# Altium PCB PC110-itx.PcbDoc (part 5 of 16)
Units mm, origin at the board's own origin, x right, y up, seen from the top; angles counter-clockwise.
Board outline 170 x 170 mm, 16 copper layers (FC1, FC2, FC3, FC4, IP1, IC1, IC2, IP2, IP3, IC3, IC4, IP4, BC4, BC3, BC2, BC1), stack 3.903 mm thick; 935 components, 1357 nets, 4698 pads, 3240 vias.
Unrouted connection lines stored in the file: 552.
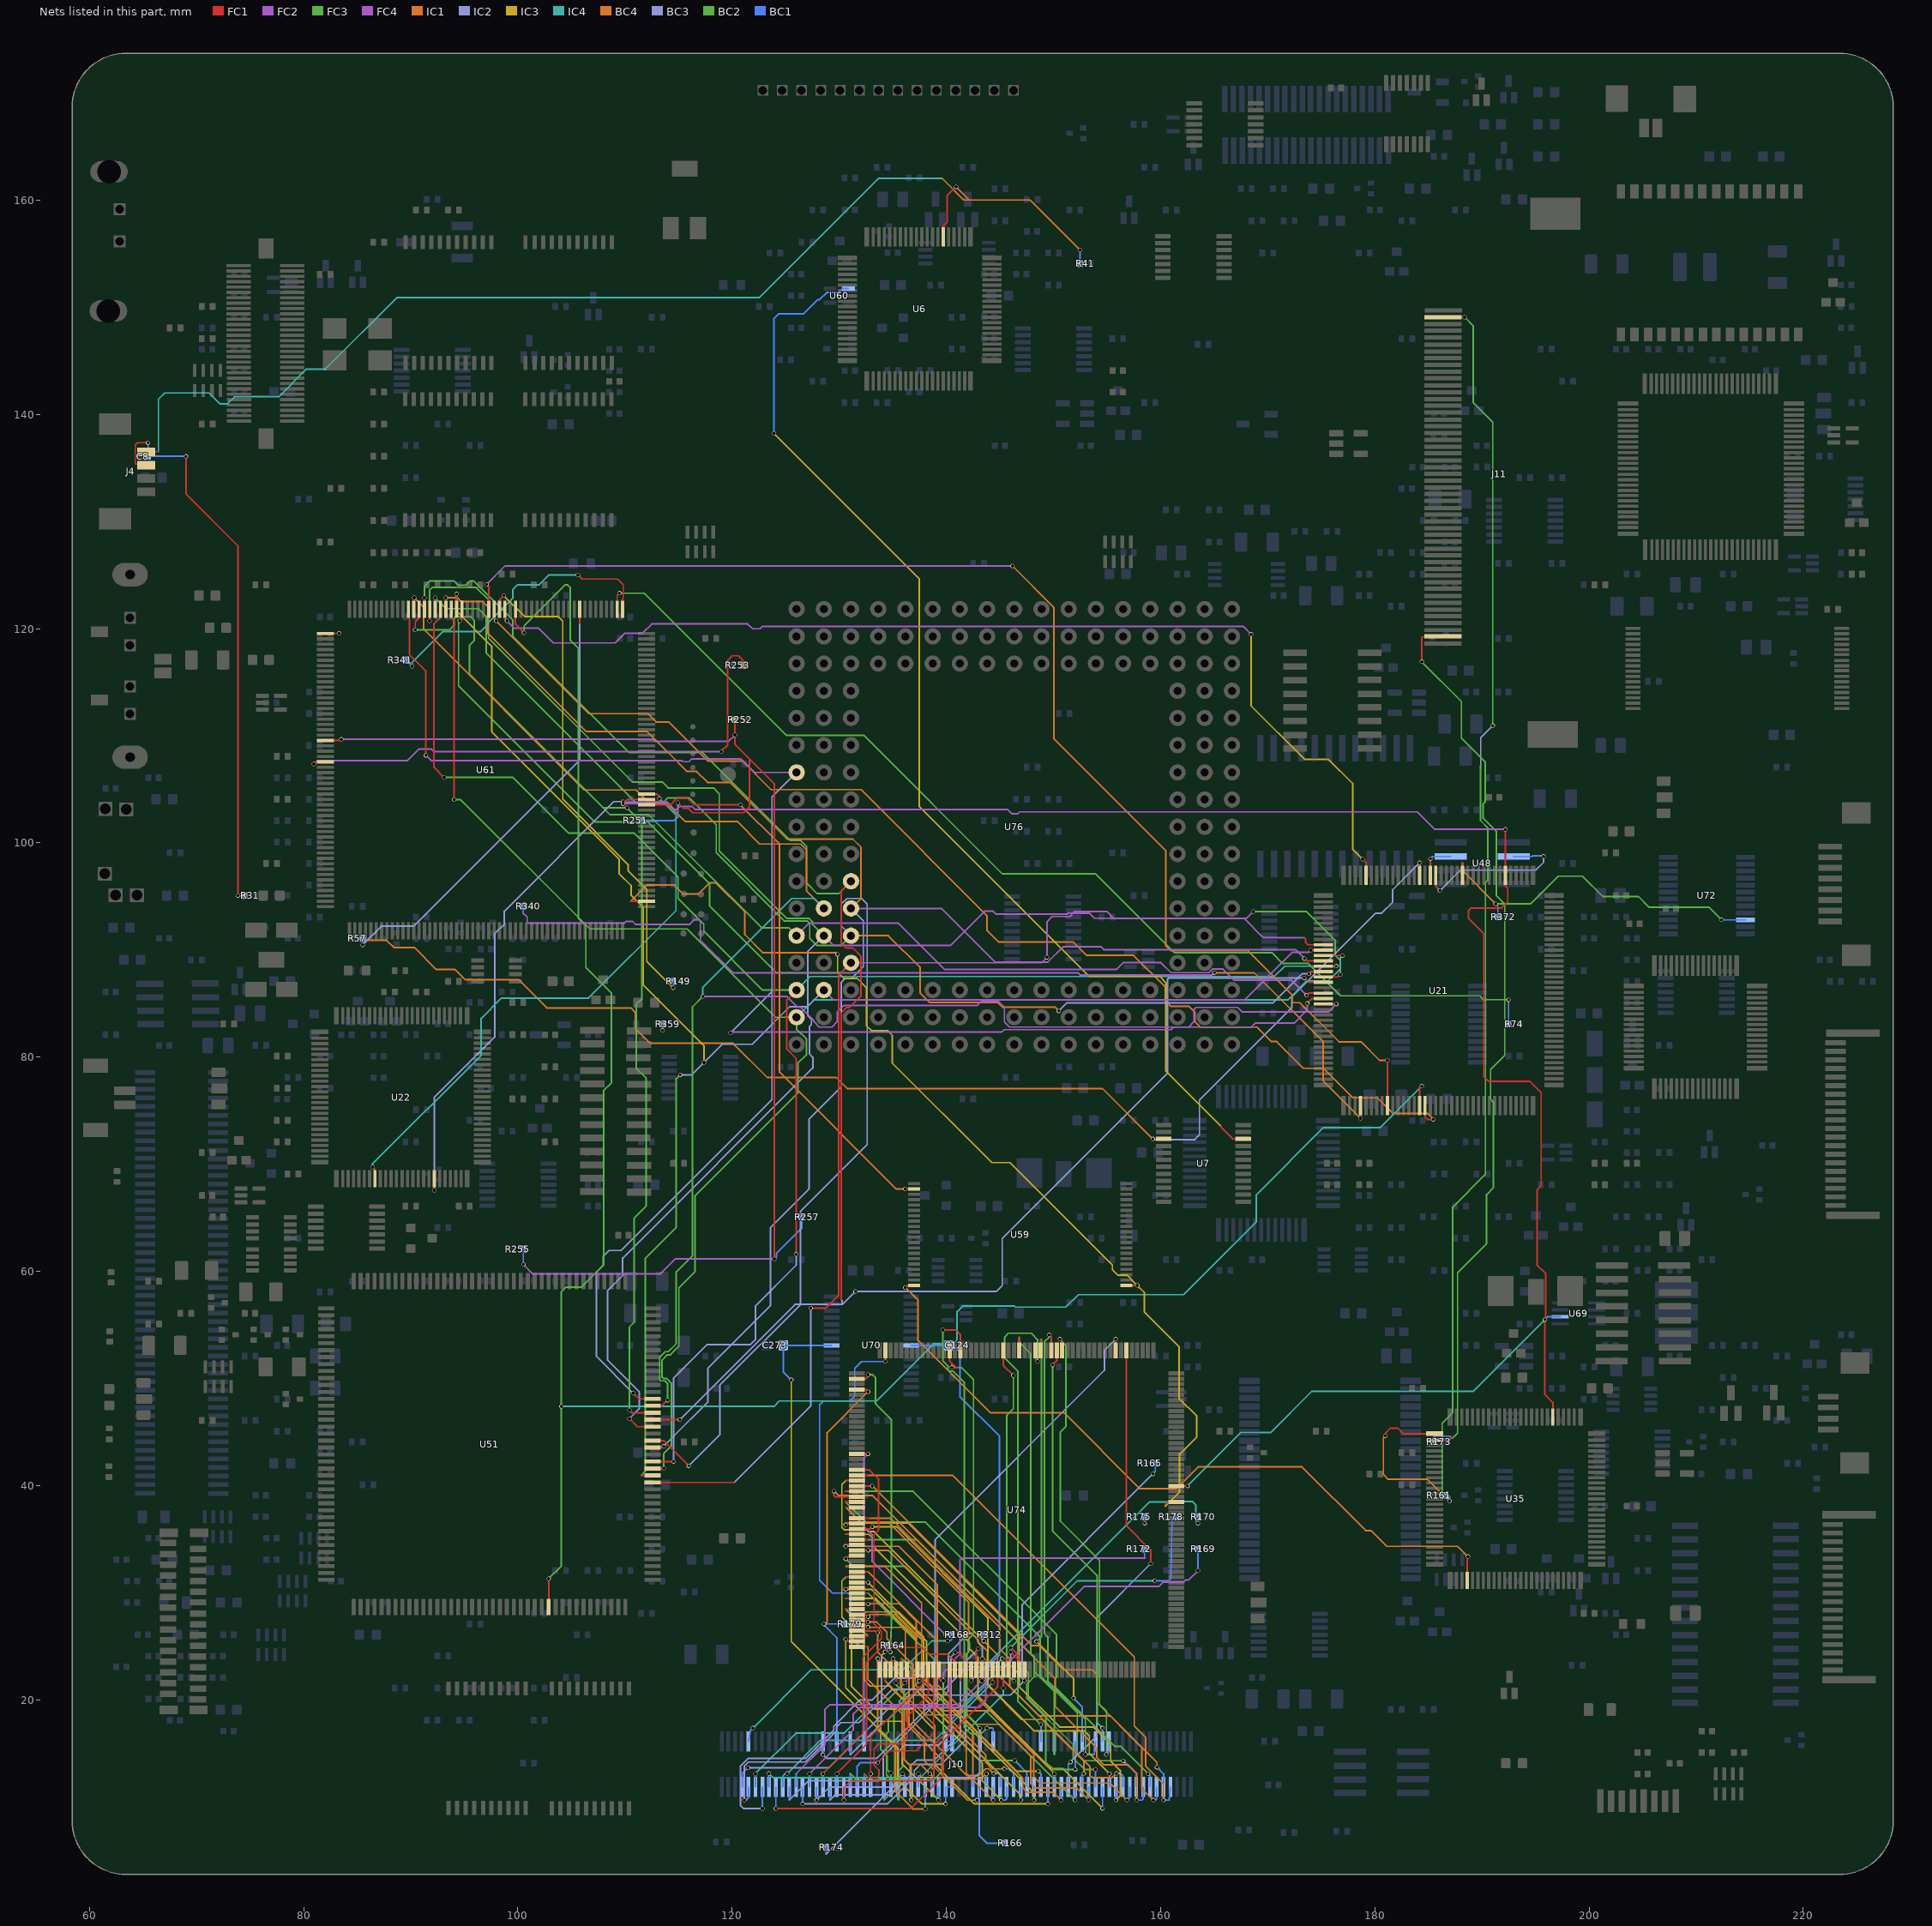
[diagram p18: the nets of this part, all layers, seen from the top]

## Via types
v1: diameter 0.4, hole 0.3, FC1 to BC1, 3240 vias

## Nets (pads, with @x,y where several pads share a name; then routed paths per layer and width w, separated by ;. In a path a pad name is that pad's centre, name@x,y a point inside that pad or via, vN(x,y) a via of type N, cw(c..) or ccw(c..) an arc to the next point about the centre after c; other vN are vias at no path point) (continued)
ACD14: J10.13 U74.18 | length 43.4
  FC1 w0.15: v1(150.597,53.67) 150.808,53.459 U74.18@150.808,52.619
  FC3 w0.15: v1(150.597,53.67) 151.155,53.111 151.155,45.517 150.647,45.009 150.647,36.678 154.306,33.019 154.306,19.583 154.94,18.948 v1(154.94,14.91)
  BC1 w0.15: v1(154.94,14.91) 155.179,15.149 J10.13@155.179,16.129
ACD15: J10.15 U74.20 | length 44.5
  FC1 w0.15: v1(149.606,54.077) 149.808,53.875 U74.20@149.808,52.619
  FC3 w0.15: v1(149.606,54.077) 149.606,53.873 149.149,53.416 149.149,26.191 149.485,25.855 149.485,21.711 152.984,18.212 v1(152.984,14.91)
  BC1 w0.15: v1(152.984,14.91) 153.822,14.91 J10.15@153.929,16.129
ACE1#: J10.14 U74.19 | length 38.6
  FC1 w0.15: v1(149.911,51.257) 150.308,51.654 U74.19@150.308,52.619
  FC3 w0.15: v1(149.911,51.257) 149.911,35.789 154.076,31.624 154.076,17.877 v1(154.579,17.374)
  BC1 w0.15: J10.14@154.579,16.129 v1(154.579,17.374)
ACE2#: J10.17 U74.22 | length 40.6
  FC1 w0.15: U74.22@148.808,52.619 148.808,53.609
  FC3 w0.15: v1(148.412,25.451) 148.869,25.908 148.869,53.67 148.808,53.609
  IC3 w0.15: v1(148.412,25.451) 151.866,21.997 v1(151.866,20.168)
  BC1 w0.15: v1(151.866,20.168) 152.679,19.355 J10.17@152.679,16.129
ACIORD#: J10.21 U74.26 | length 42.9
  FC1 w0.15: U74.26@146.808,52.619 146.808,53.869
  FC3 w0.15: 146.808,53.869 146.812,53.873 146.812,53.386 147.879,52.319 147.879,24.376 148.209,24.046 148.209,22.657 150.089,20.777 150.089,14.884 150.079,14.894
  BC1 w0.15: 150.079,14.894 J10.21@150.079,16.129
ACIOWR#: J10.23 U74.29 | length 38.5
  FC1 w0.15: U74.29@145.308,52.619 145.308,51.237 v1(146.253,50.292)
  FC3 w0.15: v1(146.253,50.292) 146.253,47.193 145.64,46.58 145.64,23.549 146.685,22.504 146.685,19.848 v1(148.829,17.704)
  BC1 w0.15: J10.23@148.829,16.129 v1(148.829,17.704)
AEN: U21.114 U22.44 U35.6 U61.21 U69.6 U74.187 | length 242.1
  FC1 w0.15: v1(92.2,67.579) U22.44@92.2,68.66 ; v1(109.825,103.657) 110.225,104.057 U61.21@112.028,104.057 ; U74.187@161.458,39.969 162.499,39.969 v1(162.509,39.98) ; v1(192.182,101.27) U21.114@192.182,96.966 192.182,95.961 192.405,95.738 192.405,94.513 191.821,93.929 188.976,93.929 188.747,93.701 188.747,92.939 190.17,91.516 190.17,78.181 190.602,77.749 194.462,77.749 195.529,76.683 195.529,67.996 195.148,67.615 195.148,60.604 195.961,59.792 v1@195.961,55.582 ; v1(195.885,55.506) 195.885,48.489 196.62,47.753 U35.6@196.62,46.4
  FC2 w0.15: v1(109.825,103.657) 114.104,103.657 ; v1(109.825,103.861) 109.89,103.796 113.965,103.796 114.104,103.657 ; v1(192.182,101.27) 185.593,101.27 183.962,102.9 146.837,102.9 146.655,102.718 146.127,102.718 145.73,103.115 116.546,103.115 116.257,103.404 115.087,103.404 114.797,103.115 114.646,103.115 114.104,103.657
  IC4 w0.15: v1(162.509,39.98) 167.483,44.954 170.256,44.954 174.095,48.793 189.172,48.793 v1(195.885,55.506) v1@195.961,55.582
  BC3 w0.15: v1(92.2,67.579) 92.2,76.23 97.841,81.87 97.841,91.542 98.73,92.431 98.73,93.631 108.959,103.861 v1(109.825,103.861)
  BC1 w0.15: v1(195.885,55.506) 196.144,55.765 U69.6@197.3,55.765
AINPACK#: J10.53 R179.2 U74.56 | length 38
  FC1 w0.15: U74.56@131.658,48.969 132.489,48.969 v1(132.69,48.768)
  IC1 w0.15: v1(128.575,27.09) 128.575,26.996 128.622,27.043 128.879,27.3 128.879,44.957 v1(132.69,48.768)
  BC1 w0.15: v1@128.575,26.996 129.779,25.791 J10.53@129.779,16.129 ; v1(128.575,27.09) R179.2@130.49,27.09
AOE#: J10.18 U74.23 | length 53.6
  FC1 w0.15: U74.23@148.308,52.619 148.308,51.793 v1(148.514,51.587)
  FC3 w0.15: v1(148.514,51.587) 148.514,53.645 147.93,54.228 145.795,54.228 145.44,53.873 145.44,51.918 146.685,50.673 146.685,23.449 147.663,22.471 147.663,20.129 149.276,18.517 149.276,14.199 149.961,13.513 v1(152.029,13.513)
  BC1 w0.15: v1(152.029,13.513) J10.18@152.029,16.129
ARDY: J10.32 R174.2 U74.39 | length 61.9
  FC1 w0.15: U74.39@140.308,52.619 140.308,51.64 140.511,51.437 ; 140.511,51.437 140.918,51.031 v1(140.511,51.031) 140.511,51.437
  FC3 w0.15: v1(140.511,51.031) 141.407,51.031 142.531,49.907 142.531,26.149 142.078,25.695 142.078,24.482 141.922,24.325 141.922,18.566 v1(143.129,17.359)
  IC2 w0.15: 128.776,5.615 128.778,5.613 135.915,12.751 142.646,12.751 143.129,13.233 v1(143.129,17.359)
  BC1 w0.15: 128.776,5.615 R174.2@128.776,6.223 ; J10.32@143.129,16.129 v1(143.129,17.359)
AREG#: J10.55 U74.8 | length 55.8
  FC1 w0.15: v1(155.804,53.67) 155.808,53.666 U74.8@155.808,52.619
  BC3 w0.15: v1(128.479,14.884) 128.835,14.529 133.502,14.529 138.963,19.989 138.963,34.977 154.762,50.776 154.762,52.629 v1(155.804,53.67)
  BC1 w0.15: v1(128.479,14.884) J10.55@128.479,16.129
ARESET: J10.49 U74.51 | length 44.4
  FC1 w0.15: v1(134.308,51.587) U74.51@134.308,52.619
  BC1 w0.15: J10.49@132.329,16.129 132.329,24.592 131.064,25.857 131.064,29.769 130.861,29.972 129.362,29.972 128.168,31.166 128.168,47.549 128.525,47.905 130.988,47.905 131.445,48.362 131.445,50.952 132.08,51.587 v1(134.308,51.587)
AVPP: C124.2 J10.36 J10.37 U70.8 | length 45.1
  BC1 w0.15: U70.8@136.713,53.09 C124.2@140.225,53.09 140.687,53.09 141.273,52.504 141.273,48.313 144.958,44.628 144.958,24.204 143.688,22.934 143.688,21.396 140.529,18.237 J10.36@140.529,16.129 J10.37@139.929,16.129
AWAIT: J10.51 R164.2 U74.54 | length 42.1
  FC1 w0.15: U74.54@131.658,49.969 132.486,49.969 132.69,50.172 v1(132.69,50.368)
  FC3 w0.15: v1(132.69,50.368) 133.096,50.368 133.401,50.063 133.401,47.625 134.874,46.152 134.874,27 v1(134.772,24.486)
  BC3 w0.15: 131.029,14.894 131.039,14.884 133.96,17.806 133.96,24.163 v1(134.287,24.49)
  BC1 w0.15: 131.029,14.894 J10.51@131.029,16.129 ; v1(134.287,24.49) 134.49,24.693 R164.2@134.49,25.09 134.772,25.09 v1(134.772,24.486)
AWE#: J10.30 U74.37 | length 45.8
  FC1 w0.15: v1(139.675,54.533) 140.895,54.533 141.308,54.12 U74.37@141.308,52.619
  FC3 w0.15: v1(139.675,54.533) 139.675,51.636 140.156,51.154 140.156,50.8 140.28,50.676 140.635,50.676 141.681,49.629 141.681,17.424 142.24,16.866 143.281,16.866 v1(143.789,17.374)
  BC1 w0.15: v1(143.789,17.374) 144.277,17.374 144.379,17.272 J10.30@144.379,16.129
AWP: J10.66 R168.2 U74.68 | length 45.6
  FC1 w0.15: U74.68@131.658,42.969 132.682,42.969 v1(132.69,42.977)
  IC4 w0.15: v1(121.945,17.374) 127.381,22.809 135.941,22.809 138.633,25.502 v1(140.106,25.502)
  FC4 w0.15: v1(132.69,42.977) 132.309,42.596 132.309,36.17 133.071,35.408 133.071,32.923 v1(139.903,26.09)
  BC1 w0.15: J10.66@121.529,16.129 121.691,17.12 v1(121.945,17.374) ; v1(139.903,26.09) R168.2@140.49,26.09 140.49,25.603 v1(140.106,25.502)
B5VDET: J10.89 U74.6 | length 44.9
  FC1 w0.15: U74.6@156.808,52.619 156.808,36.257 159.08,33.985 v1(159.08,32.715)
  BC3 w0.15: v1(151.582,14.194) 154.044,16.655 154.044,27.679 v1(159.08,32.715)
  BC1 w0.15: J10.89@151.379,11.879 151.379,13.99 v1(151.582,14.194)
BBVD1: J10.129 R175.1 U74.124 | length 25.8
  FC1 w0.15: v1(143.308,21.789) U74.124@143.308,22.819
  FC2 w0.15: 125.979,13.101 128.651,15.773 128.651,19.101 129.108,19.558 141.077,19.558 141.651,20.132 141.651,20.32 141.912,20.58 142.099,20.58 v1(143.308,21.789)
  BC1 w0.15: J10.129@125.979,11.879 125.979,13.101 ; v1(158.51,36.49) R175.1@158.51,37.09
BBVD2: J10.127 R170.2 U74.122 | length 56.5
  FC1 w0.15: v1(142.308,21.789) U74.122@142.308,22.819
  FC2 w0.15: v1(127.229,13.106) 131.318,17.195 131.318,18.694 131.928,19.304 143.078,19.304 143.688,19.914 143.688,21.915 143.459,22.144 142.663,22.144 v1(142.308,21.789)
  IC4 w0.15: v1(142.308,21.789) 159,38.481 162.154,38.481 162.204,38.531 162.938,38.531 163.297,38.172 163.297,36.683 v1(163.49,36.49)
  BC1 w0.15: J10.127@127.229,11.879 v1(127.229,13.106) ; v1(163.49,36.49) R170.2@163.49,37.09
BCA0: J10.128 U74.123 | length 30.7
  FC1 w0.15: U74.123@142.808,22.819 142.808,24.596 v1(143.002,24.79)
  BC3 w0.15: v1(126.579,10.287) 134.493,10.287 137.008,12.802 137.008,13.411 137.592,13.995 139.522,13.995 141.783,16.256 141.783,23.571 v1(143.002,24.79)
  BC1 w0.15: v1(126.579,10.287) J10.128@126.579,11.879
BCA1: J10.126 U74.121 | length 27.7
  FC1 w0.15: v1(140.843,24.435) 141.046,24.435 141.808,23.673 U74.121@141.808,22.819
  BC3 w0.15: v1(127.879,10.643) 129.098,11.862 134.81,11.862 135.534,12.586 135.534,15.164 136.144,15.773 139.243,15.773 140.437,16.967 140.437,24.028 v1(140.843,24.435)
  BC1 w0.15: v1(127.879,10.643) J10.126@127.879,11.879
BCA2: J10.124 U74.120 | length 22.5
  FC1 w0.15: 141.308,21.776 U74.120@141.308,22.819
  BC3 w0.15: 129.129,10.647 129.134,10.643 129.642,11.151 134.849,11.151 136.627,12.929 136.627,13.792 137.211,14.376 138.862,14.376 141.3,16.815 141.3,21.768 141.308,21.776
  BC1 w0.15: 129.129,10.647 J10.124@129.129,11.879
BCA3: J10.122 U74.118 | length 21.9
  FC1 w0.15: v1(130.429,10.643) 130.429,11.784 131.091,12.446 138.582,12.446 138.811,12.675 138.811,15.748 140.308,17.245 U74.118@140.308,22.819
  BC1 w0.15: v1(130.429,10.643) J10.122@130.429,11.879
BCA4: J10.120 U74.115 | length 16.3
  FC1 w0.15: v1(133.604,14.148) 134.696,15.239 137.159,15.239 138.808,16.888 U74.115@138.808,22.819
  BC1 w0.15: J10.120@131.679,11.879 131.679,13.818 132.009,14.148 v1(133.604,14.148)
BCA5: J10.118 U74.113 | length 13
  FC1 w0.15: v1(132.929,13.106) 132.929,16.602 137.866,21.539 137.866,22.144 137.808,22.144 U74.113@137.808,22.819
  BC1 w0.15: J10.118@132.929,11.879 v1(132.929,13.106)
BCA6: J10.116 U74.112 | length 14.9
  FC1 w0.15: U74.112@137.308,22.819 137.308,21.95 v1(137.49,21.768)
  BC2 w0.15: 134.179,10.652 134.188,10.643 135.204,11.659 135.204,16.027 135.103,16.129 135.103,19.004 135.636,19.538 135.636,19.914 v1(137.49,21.768)
  BC1 w0.15: 134.179,10.652 J10.116@134.179,11.879
BCA7: J10.114 U74.109 | length 17.4
  FC1 w0.15: U74.109@135.808,22.819 135.808,23.845
  BC2 w0.15: 135.479,10.723 135.56,10.643 135.56,13.392 135.915,13.748 135.915,19.406 137.846,21.336 137.846,22.022 137.566,22.301 137.363,22.301 135.814,23.851 135.808,23.845
  BC1 w0.15: 135.479,10.723 J10.114@135.479,11.879
BCA8: J10.94 U74.93 | length 30.7
  FC1 w0.15: v1(130.607,30.328) 130.748,30.469 U74.93@131.658,30.469
  IC3 w0.15: v1(130.607,30.328) 132.994,30.328 137.871,25.451 137.871,21.641 148.184,11.328 v1(148.184,10.647)
  BC1 w0.15: J10.94@148.179,11.879 148.179,10.652 v1(148.184,10.647)
BCA9: J10.92 U74.91 | length 38.1
  FC1 w0.15: 130.608,31.469 U74.91@131.658,31.469
  IC3 w0.15: 130.608,31.469 130.607,31.471 130.251,31.115 130.251,27.737 131.14,26.848 131.14,21.285 133.274,19.152 136.957,19.152 138.852,17.257 138.852,14.056 142.621,10.287 v1(149.479,10.287)
  BC1 w0.15: v1(149.479,10.287) J10.92@149.479,11.879
BCA10: J10.86 U74.85 | length 41.8
  FC1 w0.15: v1(130.607,34.341) 130.735,34.469 U74.85@131.658,34.469
  IC1 w0.15: v1(130.607,34.341) 135.56,34.341 139.141,30.759 139.141,21.438 142.85,17.729 144.882,17.729 147.879,14.732 147.879,12.192 148.285,11.786 152.156,11.786 v1(153.289,10.653)
  BC1 w0.15: J10.86@153.279,11.879 153.279,10.663 v1(153.289,10.653)
BCA11: J10.90 U74.89 | length 36
  FC1 w0.15: 130.615,32.469 U74.89@131.658,32.469
  IC1 w0.15: 130.615,32.469 130.607,32.461 134.29,32.461 137.693,29.058 137.693,22.144 147.142,12.695 147.142,11.786 147.549,11.379 149.992,11.379 v1(150.724,10.648)
  BC1 w0.15: v1(150.724,10.648) 150.729,10.653 J10.90@150.729,11.879
BCA12: J10.112 U74.107 | length 16.3
  FC1 w0.15: U74.107@134.808,22.819 134.808,23.632 v1(135.026,23.851)
  BC4 w0.15: v1(135.026,23.851) 135.75,23.127 135.75,21.231 136.068,20.913 136.068,14.427 136.728,13.767 v1(136.728,10.643)
  BC1 w0.15: v1(136.728,10.643) J10.112@136.729,11.879
BCA13: J10.96 U74.95 | length 29.7
  FC1 w0.15: 130.612,29.469 U74.95@131.658,29.469
  IC3 w0.15: 130.612,29.469 130.607,29.464 133.426,29.464 137.185,25.705 137.185,22.911 136.931,22.657 136.931,21.133 146.939,11.126 v1(146.939,10.653)
  BC1 w0.15: J10.96@146.929,11.879 146.929,10.663 v1(146.939,10.653)
BCA14: J10.98 U74.97 | length 28.4
  FC1 w0.15: 130.611,28.469 U74.97@131.658,28.469
  IC3 w0.15: 130.611,28.469 132.309,26.772 132.309,21.869 132.893,21.285 134.696,21.285 136.423,19.558 137.871,19.558 143.358,14.072 143.358,12.421 v1(145.136,10.643)
  BC1 w0.15: v1(145.136,10.643) 145.502,10.643 145.629,10.77 J10.98@145.629,11.879
BCA15: J10.110 U74.105 | length 19.7
  FC1 w0.15: v1(133.604,23.851) 133.808,23.647 U74.105@133.808,22.819
  BC4 w0.15: v1(133.604,23.851) 133.604,17.196 135.28,15.519 135.28,11.43 136.881,9.83 v1(138.029,9.83)
  BC1 w0.15: v1(138.029,9.83) J10.110@138.029,11.879
BCA16: J10.108 U74.103 | length 22.2
  FC1 w0.15: v1(130.607,25.679) 130.817,25.469 U74.103@131.658,25.469
  IC3 w0.15: v1(130.607,25.679) 130.607,21.133 133.733,18.006 135.74,18.006 135.865,17.882 135.865,14.057 v1(139.279,10.643)
  BC1 w0.15: v1(139.279,10.643) J10.108@139.279,11.879
BCA17: J10.95 U74.94 | length 27.2
  FC1 w0.15: U74.94@131.658,29.969 132.687,29.969
  BC2 w0.15: 132.687,29.969 132.69,29.972 138.887,23.774 138.887,18.542 143.078,14.351 v1(146.361,14.351)
  BC1 w0.15: v1(146.361,14.351) 147.529,13.183 J10.95@147.529,11.879
BCA18: J10.97 U74.96 | length 26.4
  FC1 w0.15: U74.96@131.658,28.969 v1(132.69,28.969)
  IC1 w0.15: v1(132.69,28.969) 135.598,28.969 137.185,27.381 137.185,22.374 137.096,22.285 137.096,21.425 143.688,14.834 143.688,14.148 144.272,13.564 v1(145.415,13.564)
  BC1 w0.15: v1(145.415,13.564) 145.821,13.564 146.279,13.106 J10.97@146.279,11.879
BCA19: J10.99 U74.98 | length 26.4
  FC1 w0.15: U74.98@131.658,27.969 132.486,27.969 v1(132.69,27.766)
  BC4 w0.15: v1(132.69,27.766) 132.893,27.969 135.15,27.969 137.185,25.933 137.185,22.171 136.931,21.917 136.931,17.932 141.935,12.929 143.027,12.929 143.662,13.564 143.993,13.564 v1(144.424,13.132)
  BC1 w0.15: v1(144.424,13.132) 144.902,13.132 145.029,13.005 J10.99@145.029,11.879
BCA20: J10.101 U74.100 | length 25.4
  FC1 w0.15: U74.100@131.658,26.969 132.492,26.969 v1(132.69,26.772)
  BC4 w0.15: v1(132.69,26.772) 135.865,26.772 136.169,26.467 136.169,23.063 136.5,22.733 136.5,17.526 139.573,14.453 139.573,13.005 139.979,12.598 143.231,12.598 v1(143.739,13.106)
  BC1 w0.15: J10.101@143.729,11.879 143.729,13.097 v1(143.739,13.106)
BCA21: J10.103 U74.102 | length 27.6
  FC1 w0.15: U74.102@131.658,25.969 132.679,25.969
  BC4 w0.15: 132.679,25.969 132.309,26.34 132.309,28.042 132.475,28.208 135.572,28.208 137.866,25.913 137.866,18.888 138.153,18.602 141.342,18.602 142.469,17.475 142.469,13.31 142.479,13.299
  BC1 w0.15: J10.103@142.479,11.879 142.479,13.299
BCA22: J10.109 U74.104 | length 17.2
  FC1 w0.15: U74.104@131.658,24.969 132.689,24.969
  IC1 w0.15: 132.69,24.968 132.69,21.895 135.865,18.72 135.865,14.63 136.5,13.995 137.566,13.995 v1(138.455,13.106)
  BC1 w0.15: v1(138.455,13.106) 138.679,12.883 J10.109@138.679,11.879
BCA23: J10.111 U74.106 | length 14.6
  FC1 w0.15: 134.308,21.775 U74.106@134.308,22.819
  IC1 w0.15: 134.308,21.775 136.296,19.787 136.296,18.059 137.947,16.409 137.947,14.326 138.81,13.462 138.81,12.951 138.582,12.723 137.772,12.723 v1(137.389,13.106)
  BC1 w0.15: J10.111@137.379,11.879 137.379,13.097 v1(137.389,13.106)
BCA24: J10.113 U74.108 | length 14.1
  FC1 w0.15: v1(135.306,21.59) 135.308,21.592 U74.108@135.308,22.819
  FC3 w0.15: v1(135.306,21.59) 135.306,21.389 136.05,20.644 136.05,19.304 135.837,19.091 135.499,19.091 134.595,18.186 134.595,17.043 134.414,16.862 134.414,13.005 134.664,12.754 135.563,12.754 v1(135.915,13.106)
  BC1 w0.15: v1(135.915,13.106) 136.129,12.893 J10.113@136.129,11.879
BCA25: J10.115 U74.110 | length 12.4
  FC1 w0.15: v1(136.119,21.59) 136.308,21.779 U74.110@136.308,22.819
  BC2 w0.15: v1(134.829,13.177) 134.468,13.538 134.468,14.808 133.858,15.418 133.858,19.329 v1(136.119,21.59)
  BC1 w0.15: J10.115@134.829,11.879 v1(134.829,13.177)
BCD0: J10.130 U74.125 | length 31.9
  FC1 w0.15: v1(143.358,23.851) 143.529,23.851 143.808,23.571 U74.125@143.808,22.819
  BC3 w0.15: 125.329,10.648 127.152,12.471 133.706,12.471 134.112,12.878 134.112,14.757 140.183,20.828 140.183,24.303 142.072,26.192 142.387,26.192 142.977,25.603 142.977,25.324 143.358,24.943 v1(143.358,23.851)
  BC1 w0.15: 125.329,10.648 J10.130@125.329,11.879
BCD1: J10.132 U74.127 | length 30.9
  FC1 w0.15: v1(124.079,9.855) 136.652,9.855 139.675,12.878 139.675,16.129 144.808,21.262 U74.127@144.808,22.819
  BC1 w0.15: v1(124.079,9.855) J10.132@124.079,11.879
BCD1#: J10.75 R312.2 U74.73 | length 48.3
  FC1 w0.15: 130.614,40.469 U74.73@131.658,40.469
  IC3 w0.15: 130.614,40.469 130.251,40.107 130.251,36.093 130.454,35.89 132.563,35.89 132.74,35.712 133.268,35.712 v1(143.49,25.49)
  BC4 w0.15: v1(143.49,25.49) 144.774,24.206 144.774,22.383 148.666,18.491 155.346,18.491 159.664,14.173 v1(159.664,13.716)
  BC1 w0.15: v1(143.49,25.49) R312.2@143.49,26.09 ; v1(159.664,13.716) 160.279,13.101 J10.75@160.279,11.879
BCD2: J10.134 U74.129 | length 38.1
  FC1 w0.15: v1(145.212,23.851) 145.529,23.851 145.808,23.571 U74.129@145.808,22.819
  IC2 w0.15: v1(122.829,9.855) 121.082,9.855 120.777,10.16 120.777,13.818 121.488,14.529 126.847,14.529 129.484,17.166 129.484,17.541 131.933,19.99 133.093,19.99 135.128,22.024 136.68,22.024 138.125,23.47 144.831,23.47 v1(145.212,23.851)
  BC1 w0.15: v1(122.829,9.855) J10.134@122.829,11.879
BCD2#: J10.137 R165.1 U74.132 | length 57.8
  FC1 w0.15: v1(147.308,21.789) U74.132@147.308,22.819
  IC2 w0.15: v1(121.488,13.665) 129.057,13.665 134.897,19.504 135.59,19.504 136.533,20.447 145.966,20.447 v1(147.308,21.789)
  BC3 w0.15: v1(147.308,21.789) 147.091,22.006 147.091,28.905 v1(159.283,41.097)
  BC1 w0.15: J10.137@120.929,11.879 120.929,13.106 v1(121.488,13.665) ; v1(159.283,41.097) 159.51,41.324 R165.1@159.51,42.09
BCD3: J10.74 U74.72 | length 49.2
  FC1 w0.15: U74.72@131.658,40.969 132.688,40.969
  IC1 w0.15: 132.688,40.969 132.69,40.97 140.564,40.97 157.543,23.991 157.543,17.565 158.598,16.51 158.598,13.843 160.274,12.167 v1(160.274,10.643)
  BC1 w0.15: v1(160.274,10.643) 160.802,10.643 J10.74@160.929,11.879
BCD4: J10.76 U74.74 | length 45.1
  FC1 w0.15: U74.74@131.658,39.969 v1(133.081,39.969)
  IC1 w0.15: v1(133.081,39.969) 147.975,25.075 148.672,25.075 150.938,22.809 153.619,22.809 154.026,22.403 154.026,19.787 158.242,15.57 158.242,11.735 v1(159.334,10.643)
  BC1 w0.15: v1(159.334,10.643) 159.512,10.643 159.629,10.76 J10.76@159.629,11.879
BCD5: J10.78 U74.76 | length 48.1
  FC1 w0.15: v1(129.515,39.497) 129.515,39.091 129.636,38.969 U74.76@131.658,38.969
  IC1 w0.15: v1(129.515,39.497) 129.921,39.091 133.084,39.091 150.156,22.019 150.156,19.414 154.03,15.54 154.03,14.63 154.721,13.94 156.977,13.94 157.759,13.157 v1(157.759,10.643)
  BC1 w0.15: v1(157.759,10.643) 158.252,10.643 158.379,10.77 J10.78@158.379,11.879
BCD6: J10.80 U74.78 | length 46.1
  FC1 w0.15: 130.611,37.969 U74.78@131.658,37.969
  IC1 w0.15: 130.611,37.969 131.978,36.601 134.569,36.601 142.078,29.092 142.078,24.519 141.884,24.325 141.884,21.184 148.158,14.91 148.158,12.827 148.742,12.243 155.245,12.243 v1(156.845,10.643)
  BC1 w0.15: v1(156.845,10.643) 157.129,10.927 J10.80@157.129,11.879
BCD7: J10.82 U74.81 | length 44.3
  FC1 w0.15: v1(130.607,36.347) 130.728,36.469 U74.81@131.658,36.469
  IC3 w0.15: v1(130.607,36.347) 130.784,36.525 136.399,36.525 146.787,26.136 146.787,21.259 150.571,17.475 153.695,17.475 155.346,15.824 155.346,14.3 156.235,13.411 156.235,11.049 v1(155.829,10.643)
  BC1 w0.15: v1(155.829,10.643) J10.82@155.829,11.879
BCD8: J10.131 U74.126 | length 25.4
  FC1 w0.15: v1(144.308,21.626) U74.126@144.308,22.819
  IC4 w0.15: v1(125.146,13.132) 128.245,16.231 138.913,16.231 v1(144.308,21.626)
  BC1 w0.15: J10.131@124.729,11.879 124.729,12.893 124.968,13.132 v1(125.146,13.132)
BCD9: J10.133 U74.128 | length 28.8
  FC1 w0.15: U74.128@145.308,22.819 145.308,21.113 v1(145.313,21.107)
  IC4 w0.15: v1(123.429,13.132) 123.81,12.751 137.591,12.751 145.313,20.473 v1(145.313,21.107)
  BC1 w0.15: J10.133@123.429,11.879 v1(123.429,13.132)
BCD10: J10.135 U74.130 | length 30.4
  FC1 w0.15: v1(146.308,21.768) U74.130@146.308,22.819
  IC4 w0.15: v1(122.179,13.106) 125.964,16.891 130.429,16.891 132.791,19.253 141.3,19.253 144.272,22.225 145.851,22.225 v1(146.308,21.768)
  BC1 w0.15: J10.135@122.179,11.879 v1(122.179,13.106)
BCD11: J10.77 U74.75 | length 44.5
  FC1 w0.15: 130.609,39.469 U74.75@131.658,39.469
  BC2 w0.15: 130.609,39.469 130.607,39.472 136.905,39.472 150.291,26.085 150.291,22.144 150.156,22.009 150.156,21.218 155.702,15.672 156.261,15.672 v1(158.826,13.106)
  BC1 w0.15: v1(158.826,13.106) 159.029,12.904 J10.77@159.029,11.879
BCD12: J10.79 U74.77 | length 44.3
  FC1 w0.15: 130.619,38.469 U74.77@131.658,38.469
  BC2 w0.15: 130.619,38.469 132.486,36.601 137.998,36.601 148.768,25.832 148.768,22.25 152.222,18.796 152.222,14.905 152.806,14.321 v1(156.514,14.321)
  BC1 w0.15: v1(156.514,14.321) 157.729,13.106 J10.79@157.729,11.879
BCD13: J10.81 U74.80 | length 39.3
  FC1 w0.15: U74.80@131.658,36.969 132.881,36.969
  IC1 w0.15: 132.881,36.969 132.893,36.957 134.798,36.957 144.983,26.772 144.983,24.761 145.923,23.821 145.923,21.26 153.391,13.792 153.391,12.979 153.619,12.751 155.499,12.751 v1(155.88,13.132)
  BC1 w0.15: v1(155.88,13.132) 156.261,13.132 156.479,12.914 J10.81@156.479,11.879
BCD14: J10.83 U74.82 | length 39
  FC1 w0.15: U74.82@131.658,35.969 132.895,35.969 v1(133.096,36.17)
  IC3 w0.15: v1(133.096,36.17) 135.357,36.17 143.866,27.661 143.866,21.463 148.234,17.094 152.908,17.094 153.34,16.662 153.34,14.996 v1(155.229,13.106)
  BC1 w0.15: J10.83@155.229,11.879 v1(155.229,13.106)
BCD15: J10.85 U74.84 | length 36.7
  FC1 w0.15: U74.84@131.658,34.969 132.69,34.969
  BC2 w0.15: 132.69,34.969 132.708,34.95 137.246,34.95 148.184,24.013 148.184,22.149 147.523,21.488 147.523,20.142 151.841,15.824 151.841,14.58 152.913,13.508 v1(153.929,13.508)
  BC1 w0.15: J10.85@153.929,11.879 v1(153.929,13.508)
BCE1#: J10.84 U74.83 | length 40.5
  FC1 w0.15: 130.617,35.469 U74.83@131.658,35.469
  IC3 w0.15: 130.617,35.469 130.607,35.458 132.767,35.458 133.072,35.154 133.072,34.401 142.157,25.317 142.157,24.772 142.951,23.978 142.951,20.371 149.733,13.589 150.867,13.589 v1(154.579,9.877)
  BC1 w0.15: v1(154.579,9.877) J10.84@154.579,11.879
BCE2#: J10.87 U74.86 | length 33.8
  FC1 w0.15: U74.86@131.658,33.969 v1(132.69,33.969)
  BC4 w0.15: v1(132.69,33.969) 134.583,33.969 142.893,25.659 142.893,25.484 143.84,24.536 143.84,21.35 147.029,18.161 148.946,18.161 152.832,14.275 v1(152.832,13.132)
  BC1 w0.15: J10.87@152.629,11.879 152.629,12.929 v1(152.832,13.132)
BCIORD#: J10.91 U74.90 | length 31
  FC1 w0.15: U74.90@131.658,31.969 132.69,31.969
  BC4 w0.15: 132.69,31.969 132.699,31.979 139.141,25.537 139.141,19.507 139.675,18.974 144.221,18.974 v1(150.089,13.106)
  BC1 w0.15: J10.91@150.079,11.879 150.079,13.097 v1(150.089,13.106)
BCIOWR#: J10.93 U74.92 | length 28
  FC1 w0.15: U74.92@131.658,30.969 v1(132.69,30.969)
  IC3 w0.15: v1(132.69,30.969) 138.151,25.508 138.151,21.768 146.582,13.336 v1(148.589,13.336)
  BC1 w0.15: v1(148.589,13.336) 148.829,13.096 J10.93@148.829,11.879
BINPACK#: J10.123 R172.1 U74.119 | length 50.8
  FC1 w0.15: v1(129.779,13.106) 132.563,15.89 132.563,23.52 133.934,24.892 137.719,24.892 138.354,24.257 140.122,24.257 140.808,23.571 ; U74.119@140.808,22.819 140.808,23.571 ; 140.808,23.841 140.808,23.571
  FC2 w0.15: 140.808,23.841 141.275,24.308 141.275,33.096 141.402,33.223 158.521,33.223 158.51,33.235
  BC1 w0.15: J10.123@129.779,11.879 v1(129.779,13.106) ; 158.51,33.235 R172.1@158.51,34.09
BIOS_SA17: U35.54 U59.40 | length 70
  FC1 w0.15: v1(136.169,58.496) 136.363,58.69 U59.40@137,58.69 ; U35.54@188.62,31.15 188.62,33.299 v1(188.697,33.376)
  BC4 w0.15: v1(136.169,58.496) 137.363,57.302 137.363,53.543 144.094,46.812 150.978,46.812 158.082,39.708 161.45,39.708 163.494,41.751 173.209,41.751 179.15,35.811 179.651,35.811 181.121,34.341 187.731,34.341 v1(188.697,33.376)
BOE#: J10.88 U74.87 | length 39
  FC1 w0.15: v1(130.607,33.172) 130.903,33.469 U74.87@131.658,33.469
  BC2 w0.15: v1(130.607,33.172) 131.293,32.487 136.144,32.487 139.141,29.489 139.141,19.507 139.675,18.974 143.698,18.974 v1(152.019,10.653)
  BC1 w0.15: v1(152.019,10.653) 152.029,10.663 J10.88@152.029,11.879
Bowman1: U21.45 U61.78 | length 123.3
  FC1 w0.15: v1(97.075,124.13) 97.278,123.927 U61.78@97.278,121.807 ; U21.45@181.182,75.491 v1(181.182,79.705)
  IC1 w0.15: v1(146.177,125.857) 150.038,121.996 150.038,109.728 160.477,99.289 160.477,90.424 160.934,89.967 168.123,89.967 172.289,85.801 172.289,85.117 173.012,85.077 176.657,81.432 178.705,81.432 180.432,79.705 v1(181.182,79.705)
  FC4 w0.15: v1(97.075,124.13) 98.802,125.857 v1(146.177,125.857)
Bowman2: U21.140 U61.75 | length 101.1
  FC1 w0.15: U61.75@98.778,121.807 98.778,120.929 v1(98.981,120.726) ; v1(178.867,98.476) 179.182,98.161 U21.140@179.182,96.966
  IC3 w0.15: v1(168.453,119.482) 168.453,112.801 173.457,107.798 175.692,107.798 177.927,105.562 177.927,99.416 v1(178.867,98.476)
  FC4 w0.15: v1(98.981,120.726) 99.642,120.066 101.906,120.066 103.303,118.669 109.068,118.669 109.982,119.583 111.633,119.583 112.497,120.447 121.448,120.447 121.904,119.99 122.614,119.99 122.845,120.22 167.714,120.22 v1(168.453,119.482)
Bowman3: R149.2 U61.76 | length 47
  FC1 w0.15: U61.76@98.278,121.807 98.278,122.682 v1(98.684,123.088)
  IC3 w0.15: v1(98.684,123.088) 100.635,121.138 103.754,121.138 104.191,120.701 104.191,104.089 110.287,97.993 110.287,97.403 112.039,95.65 112.039,88.938 v1(114.49,86.487)
  BC1 w0.15: v1(114.49,86.487) R149.2@114.49,87.09
Bowman4: U21.52 U61.77 | length 111.9
  FC1 w0.15: U61.77@97.778,121.807 97.778,120.929 v1(97.981,120.726) ; U21.52@184.682,75.491 184.682,74.423 184.912,74.193 v1(185.471,74.193)
  BC4 w0.15: v1(97.981,120.726) 106.643,112.065 112.141,112.065 112.91,111.296 114.079,111.296 117.718,107.656 120.944,107.656 123.622,104.978 132.029,104.978 143.79,93.217 143.79,91.871 144.911,90.751 151.863,90.751 153.104,89.51 157.48,89.51 160.426,86.563 160.426,85.268 160.934,84.76 162.636,84.76 163.205,84.191 163.205,83.312 163.707,82.81 168.986,82.81 170.339,81.458 170.84,81.458 173.33,78.969 175.184,78.969 177.952,76.2 180.238,76.2 181.686,74.752 184.912,74.752 v1(185.471,74.193)
Bowman5: R57.1 U7.3 U21.130 U61.61 | length 165.6
  FC1 w0.15: 105.778,120.535 U61.61@105.778,121.807 ; v1(159.27,72.365) U7.3@160.288,72.365 ; v1(184.175,98.146) 184.182,98.139 U21.130@184.182,96.966
  IC2 w0.15: v1(85.51,90.49) 87.247,92.227 90.272,92.227 105.778,107.734 105.778,120.535
  BC4 w0.15: v1(85.51,90.49) 85.927,90.907 87.746,90.907 88.417,90.235 90.322,90.235 92.368,88.189 94.132,88.189 95.079,87.242 100.058,87.242 102.696,84.604 110.541,84.604 110.973,84.172 110.973,82.677 112.344,81.305 120.091,81.305 123.292,78.105 129.718,78.105 130.759,77.064 154.571,77.064 v1(159.27,72.365)
  BC3 w0.15: v1(159.27,72.365) 159.321,72.314 163.195,72.314 163.627,72.746 163.627,75.997 172.269,84.639 172.269,85.649 180.066,93.447 180.645,93.447 181.661,94.463 181.661,95.631 v1(184.175,98.146)
  BC1 w0.15: v1(85.51,90.49) R57.1@85.51,91.09
Bowman5_Buff: U7.22 U60.1 | length 107.3
  FC1 w0.15: 165.633,73.558 165.633,73.482 166.751,72.365 U7.22@167.712,72.365
  IC3 w0.15: v1(123.901,138.227) 137.465,124.663 137.465,103.403 153.314,87.554 159.893,87.554 160.477,86.97 160.477,78.715 165.633,73.558
  BC1 w0.15: v1(123.901,138.227) 123.901,148.946 124.358,149.403 126.67,149.403 127.991,150.724 128.168,150.724 128.829,151.384 129.946,151.384 130.302,151.74 U60.1@130.85,151.74
Bowman_Audio_Vol_Dn: U21.128 U48.7 | length 3.6
  FC1 w0.15: U21.128@185.182,96.966 v1(185.182,98.537)
  BC1 w0.15: v1(185.182,98.537) 185.385,98.74 U48.7@187.1,98.74
Bowman_Audio_Vol_Up: U21.127 U48.2 | length 15.8
  FC1 w0.15: U21.127@185.682,96.966 185.682,95.953 v1(186.08,95.555)
  IC2 w0.15: v1(186.08,95.555) 187.985,97.46 195.02,97.46 195.758,98.197 v1(195.758,98.74)
  BC1 w0.15: U48.2@192.95,98.74 194.689,98.74 194.759,98.811 195.687,98.811 v1(195.758,98.74)
Bowman_CLK: R340.2 U21.40 | length 92.1
  FC1 w0.15: v1(178.664,74.295) U21.40@178.664,75.491
  FC2 w0.15: 100.49,93.48 100.482,93.472 100.864,93.09 100.864,92.633 100.99,92.507 109.948,92.507 110.125,92.684 110.694,92.684 110.975,92.404 116.055,92.404 116.488,92.836 116.865,92.836 117.043,92.659 117.043,90.907 120.066,87.884 152.295,87.884 152.519,87.66 164.799,87.66 v1(165.022,87.884)
  IC1 w0.15: v1(165.022,87.884) 168.732,87.884 175.184,81.432 175.184,77.775 v1(178.664,74.295)
  BC1 w0.15: 100.49,93.48 R340.2@100.49,94.09
Bowman_ESS_DACK1#: R372.2 U21.122 U72.10 | length 33.7
  FC1 w0.15: U21.122@188.182,96.966 188.182,98.139
  IC1 w0.15: 188.182,98.139 188.189,98.146 188.189,97.409 v1(191.287,94.311)
  BC2 w0.15: v1(191.287,94.311) 194.539,94.311 197.129,96.901 199.39,96.901 201.295,94.996 204.597,94.996 205.588,94.005 211.176,94.005 v1(212.366,92.815)
  BC1 w0.15: v1(191.287,94.311) 191.49,94.108 R372.2@191.49,93.09 ; v1(212.366,92.815) U72.10@214.6,92.815
BRDY: J10.102 R166.2 U74.101 | length 29.5
  FC1 w0.15: U74.101@131.658,26.469 132.387,26.417 133.428,26.417 v1(133.579,26.266)
  IC1 w0.15: v1(133.579,26.266) 133.579,24.507 135.75,22.336 135.75,20.804 138.913,17.642 138.913,13.691 141.961,10.643 v1(142.85,10.643)
  BC1 w0.15: v1(142.85,10.643) 143.079,10.872 ; J10.102@143.079,11.879 143.079,10.872 ; R166.2@145.474,6.627 143.767,6.627 143.079,7.315 143.079,10.643 143.079,10.872
BREG#: J10.125 U74.71 | length 33.8
  FC1 w0.15: v1(128.479,13.106) 132.207,16.834 132.207,23.978 133.934,25.705 133.934,26.416 133.248,27.102 133.248,35.409 133.654,35.815 133.654,40.641 132.826,41.469 U74.71@131.658,41.469
  BC1 w0.15: J10.125@128.479,11.879 v1(128.479,13.106)
BRESET: J10.119 U74.114 | length 16.2
  FC1 w0.15: 132.329,13.101 132.334,13.106 132.715,12.725 133.502,12.725 133.706,12.929 133.706,13.462 133.248,13.919 133.248,15.443 133.706,15.9 135.738,15.9 136.373,16.535 136.373,18.486 138.308,20.422 U74.114@138.308,22.819
  BC1 w0.15: J10.119@132.329,11.879 132.329,13.101
BVPP: C273.1 J10.106 J10.107 U70.23 | length 57.1
  IC3 w0.15: v1(125.527,49.87) 125.527,25.451 135.458,15.519 135.458,12.573 137.744,10.287 v1(139.929,10.287)
  BC1 w0.15: v1(125.527,49.87) 124.775,50.622 C273.1@124.775,53.09 U70.23@129.288,53.09 ; v1(139.929,10.287) J10.107@139.929,11.879 J10.106@140.529,11.879
BWAIT: J10.121 R169.2 U74.116 | length 50.7
  FC1 w0.15: U74.116@139.308,22.819 139.308,21.992 139.511,21.789 v1(139.714,21.789)
  FC2 w0.15: v1(139.714,21.789) 139.714,22.544 139.979,22.809 145.085,22.809 152.858,30.582 159.816,30.582 160.222,30.988 162.133,30.988 162.353,31.208 162.627,31.208 v1(163.49,32.07)
  FC3 w0.15: 131.029,13.097 131.039,13.106 131.623,12.522 138.811,12.522 139.714,13.426 v1(139.714,21.789)
  BC1 w0.15: J10.121@131.029,11.879 131.029,13.097 ; v1(163.49,32.07) R169.2@163.49,34.09
BWE#: J10.100 U74.99 | length 24.3
  FC1 w0.15: U74.99@131.658,27.469 132.486,27.469 v1(132.69,27.266)
  IC1 w0.15: v1(132.69,27.266) 133.509,27.266 134.449,26.326 134.449,25.735 136.866,23.318 136.866,21.282 141.859,16.29 141.859,13.157 v1(144.374,10.643)
  BC1 w0.15: v1(144.374,10.643) 144.379,10.648 J10.100@144.379,11.879
BWP: J10.136 R178.1 U74.131 | length 62.1
  FC1 w0.15: v1(145.999,24.46) 146.808,23.651 ; v1(145.999,24.892) 146.808,24.083 146.808,23.651 ; U74.131@146.808,22.819 146.808,23.651
  IC2 w0.15: v1(121.133,10.643) 121.133,13.818 121.514,14.199 126.86,14.199 129.73,17.069 129.73,17.462 130.15,17.882 131.851,17.882 134.971,21.001 139.847,21.001 141.935,23.089 145.517,23.089 145.999,23.571 v1(145.999,24.46)
  IC4 w0.15: v1(145.999,24.892) 152.222,31.115 v1(159.461,31.115)
  BC1 w0.15: v1(121.133,10.643) 121.31,10.643 121.529,10.861 J10.136@121.529,11.879 ; v1(159.461,31.115) 160.731,31.115 160.96,31.344 161.067,37.09 R178.1@161.51,37.09
CF_CD1_Pluto: J11.2 R173.2 U35.27 | length 86.3
  FC1 w0.15: v1(184.379,116.916) 184.379,119.146 184.506,119.273 J11.2@186.358,119.273 ; U35.27@185.57,44.25 186.969,44.25 187.173,44.453
  FC3 w0.15: v1(184.379,116.916) 188.087,113.208 188.087,109.779 190.297,107.569 190.297,103.826 190.097,103.626 190.097,102.333 191.338,101.092 191.338,95.098 192.125,94.311 192.125,80.162 190.805,78.842 190.805,76.073 191.059,75.819 191.059,67.8 190.432,67.173 190.432,62.577 187.729,59.873 187.729,44.908 187.274,44.453 187.173,44.453
  BC1 w0.15: R173.2@185.49,44.09 185.49,44.501 185.617,44.628 186.998,44.628 187.173,44.453
CF_CD2_Pluto: J11.49 R161.1 U35.26 | length 134
  FC1 w0.15: v1(180.975,44.653) 180.975,44.882 181.458,45.364 182.143,45.364 182.658,44.85 U35.26@185.57,44.85 ; J11.49@186.358,149.072 v1(188.392,149.072)
  FC3 w0.15: v1(186.969,38.557) 186.284,39.243 186.284,45.822 187.274,46.812 187.274,66.015 190.322,69.063 190.322,96.291 190.551,96.52 190.551,101.397 189.867,102.081 189.867,107.164 ; v1(188.392,149.072) 189.179,148.285 189.179,141.122 191.008,139.294 v1(191.008,110.947)
  IC1 w0.15: v1(180.975,44.653) 180.797,44.475 180.797,41.046 181.255,40.589 184.938,40.589 v1(186.969,38.557)
  IC2 w0.15: 189.867,107.164 189.89,107.188 189.89,109.83 v1(191.008,110.947)
  BC1 w0.15: v1(186.969,38.557) 186.969,38.963 ; 186.969,38.963 186.842,39.09 R161.1@186.51,39.09 186.969,38.963
Chipset_2XCPU_CLK: R359.2 U61.105 | length 1.9
  FC1 w0.15: U61.105@82.028,119.557 v1(83.311,119.557)
  BC1 w0.15: v1(113.49,82.49) R359.2@113.49,83.09
Chipset_32KHz: U21.51 U51.109 U61.73 | length 206.9
  FC1 w0.15: U61.73@99.778,121.807 99.778,120.416 v1(100.584,119.61) ; U51.109@102.875,28.66 v1(102.875,31.318) ; U21.51@184.182,75.491 184.182,77.096 v1(184.379,77.292)
  FC3 w0.15: v1(100.584,119.61) 100.584,120.269 104.397,124.082 104.648,124.082 104.896,123.834 104.896,118.929 105.638,118.187 105.638,92.965 106.35,92.253 106.35,88.367 108.737,85.979 108.737,77.614 108.004,76.88 108.004,60.608 105.918,58.522 104.47,58.522 104.064,58.115 v1(104.064,47.401) 104.064,32.507 v1(102.875,31.318)
  IC4 w0.15: v1(104.064,47.401) 123.906,47.401 124.41,47.905 133.478,47.905 138.811,53.238 140.589,53.238 140.995,53.645 140.995,56.236 141.517,56.757 146.355,56.757 146.445,56.667 151.155,56.667 152.324,57.836 162.154,57.836 168.935,64.618 168.935,67.158 175.209,73.431 180.518,73.431 v1(184.379,77.292)
Chipset_BIOS_CE#: U59.22 U61.20 | length 52.8
  FC1 w0.15: U61.20@112.028,103.557 114.22,103.557 114.853,104.19 115.823,104.19 116.457,103.557 v1(120.777,103.557) ; v1(136.169,67.691) v1(136.169,67.691) U59.22@137,67.69
  IC1 w0.15: v1(120.777,103.557) 124.435,99.899 124.435,78.595 135.339,67.691 v1(136.169,67.691)
Chipset_CLK: R341.1 U61.53 | length 27.8
  FC1 w0.15: v1(105.613,125.019) 105.994,124.638 109.322,124.638 109.83,124.13 109.83,122.81 109.778,122.758 U61.53@109.778,121.807
  IC4 w0.15: v1(90.119,116.484) 90.119,116.84 93.015,119.736 96.559,119.736 97.038,120.215 97.038,120.355 99.517,122.834 99.517,123.647 99.974,124.104 102.006,124.104 102.921,125.019 v1(105.613,125.019)
  BC1 w0.15: R341.1@89.51,117.09 89.51,116.789 89.814,116.789 v1(90.119,116.484)
Chipset_CPU_CLK: R251.1 R252.1 R255.1 R257.2 U61.125 | length 138
  FC1 w0.15: U61.125@82.028,109.557 83.395,109.557 v1(83.513,109.675) ; v1(114.935,103.759) 115.446,103.248 115.875,103.248 116.303,102.819 121.082,102.819 121.615,103.353 121.615,107.848 ; R252.1@120.267,111.506 v1(120.267,110.082) 120.267,109.197 121.615,107.848 ; v1(123.952,61.171) 123.952,105.512 121.615,107.848
  FC2 w0.15: v1(100.51,60.653) 101.397,59.766 113.284,59.766 114.688,61.171 v1(123.952,61.171)
  FC4 w0.15: v1(83.513,109.675) 112.576,109.675 112.752,109.499 119.684,109.499 v1(120.267,110.082)
  BC1 w0.15: v1(100.51,60.653) R255.1@100.51,62.09 ; R251.1@111.51,102.09 114.612,102.09 114.935,102.413 v1(114.935,103.759) ; v1(123.952,61.171) 124.155,61.374 124.155,61.697 126.49,64.031 R257.2@126.49,65.09
Chipset_CPU_CLK_Sense: R253.2 U61.129 | length 50.9
  FC1 w0.15: v1(80.95,107.366) 81.141,107.557 U61.129@82.028,107.557 ; v1(118.974,108.534) 119.583,109.144 119.583,117.043 120.015,117.475 120.601,117.475 121.033,117.043 R253.2@121.033,116.586
  FC2 w0.15: v1(80.95,107.366) 81.255,107.671 89.649,107.671 90.741,108.764 91.93,108.764 92.159,108.534 v1(118.974,108.534)
Chipset_FDC_TC: U22.33 U61.22 | length 54.2
  FC1 w0.15: v1(86.436,69.748) 86.65,69.535 U22.33@86.65,68.66 ; U61.22@112.028,104.557 112.979,104.557 113.225,104.312 v1(113.225,104.151)
  IC4 w0.15: v1(86.436,69.748) 86.436,70.041 96.571,80.175 96.571,83.617 98.476,85.522 106.604,85.522 114.757,93.675 114.757,102.618 v1(113.225,104.151)
Chipset_SA16: U59.1 U61.2 U74.184 | length 98.3
  FC1 w0.15: 110.548,94.557 U61.2@112.028,94.557 ; U59.1@156.8,58.69 v1(157.833,58.69) ; 160.426,38.202 160.694,38.469 U74.184@161.458,38.469
  IC3 w0.15: v1(129.845,89.611) 129.845,87.935 130.429,87.351 131.674,87.351 132.563,86.462 132.563,82.906 132.994,82.474 134.518,82.474 134.95,82.042 134.95,79.451 144.247,70.155 145.948,70.155 155.499,60.604 155.499,60.147 155.981,59.665 156.859,59.665 v1(157.833,58.69) 158.471,58.053 158.471,56.236 161.722,52.984 161.722,48.158 163.373,46.507 163.373,44.552 161.773,42.951 161.773,39.421 160.426,38.075 160.426,38.202
  BC4 w0.15: 110.548,94.557 110.541,94.564 112.039,96.063 114.605,96.063 115.443,95.225 116.84,95.225 117.907,96.291 118.45,96.291 121.182,93.56 121.182,91.441 122.885,89.738 129.718,89.738 v1(129.845,89.611)
Chipset_Sound: R74.2 U61.54 | length 102.6
  FC1 w0.15: U61.54@109.278,121.807 109.278,123.121 v1(109.474,123.317)
  BC2 w0.15: v1(109.474,123.317) 111.785,123.317 125.044,110.058 132.283,110.058 145.237,97.104 153.924,97.104 161.29,89.738 170.419,89.738 171.409,88.748 173.786,88.748 176.809,85.725 189.789,85.725 190.144,85.369 v1(192.481,85.369)
  BC1 w0.15: v1(192.481,85.369) 192.49,85.361 R74.2@192.49,83.09
CMOS_BATT+: C8.1 J4.3 R31.2 | length 52.5
  FC1 w0.15: J4.3@65.3,135.27 64.287,135.397 64.287,137.16 64.491,137.363 v1(65.48,137.363) ; v1(69.013,136.09) 69.013,132.587 73.863,127.737 v1(73.863,95.09)
  BC1 w0.15: v1(65.48,137.363) C8.1@65.48,136.09 v1(69.013,136.09) ; v1(73.863,95.09) R31.2@74.49,95.09
CMOS_BATT_Sense: J4.4 R41.2 U6.6 | length 112.4
  FC1 w0.15: J4.4@65.3,136.52 66.441,136.52 ; U6.6@139.71,156.575 139.71,157.588 140.065,157.943 140.065,160.405 v1(140.91,161.25)
  IC4 w0.15: 66.441,136.52 66.446,136.525 66.446,141.427 67.031,142.011 71.172,142.011 72.187,140.996 72.897,140.996 73.558,141.657 77.674,141.657 80.258,144.241 82.036,144.241 88.697,150.901 122.53,150.901 133.655,162.027 139.518,162.027
  BC4 w0.15: 139.518,162.027 139.571,162.079 141.63,160.02 142.14,160.02 ; v1(140.91,161.25) 142.14,160.02 ; v1(152.49,155.346) 147.816,160.02 142.14,160.02
  BC1 w0.15: R41.2@152.49,154.09 v1(152.49,155.346)
CPU_A2: U21.10 U51.135 U61.83 U76.Q14 | length 167.6
  FC1 w0.15: v1(94.575,120.726) 94.778,120.929 U61.83@94.778,121.807 ; U51.135@112.57,40.305 120.213,40.305 ; v1(127.33,56.566) 128.727,56.566 129.955,57.794 129.955,87.66 U76.Q14@131.103,88.807 ; 173.42,91.146 173.537,91.029 173.537,90.709 173.755,90.491 U21.10@175.209,90.491
  FC2 w0.15: v1(149.403,89.332) 149.403,92.659 149.874,93.13 151.525,93.13 151.994,93.599 154.965,93.599 155.6,92.964 167.792,92.964 169.61,91.146 173.42,91.146
  IC2 w0.15: 120.213,40.305 127.33,47.422 v1(127.33,56.566)
  FC4 w0.15: U76.Q14@131.103,88.807 148.878,88.807 v1(149.403,89.332)
  BC2 w0.15: v1(94.575,120.726) 94.463,120.615 94.463,114.668 107.159,101.972 112.099,101.972 117.907,96.164 117.907,94.096 124.119,87.884 130.179,87.884 U76.Q14@131.103,88.807
CPU_A3: U21.11 U51.136 U61.84 U76.R15 | length 160.3
  FC1 w0.15: U61.84@94.278,121.807 94.278,123.234 v1(94.285,123.241) ; 111.516,40.955 U51.136@112.57,40.955 ; v1(174.015,89.992) 174.219,89.992 ; 174.219,89.993 U21.11@175.209,89.993
  FC3 w0.15: 111.516,40.955 111.887,41.326 111.887,61.202 114.783,64.098 114.783,77.978 v1(115.164,78.359)
  IC2 w0.15: v1(115.164,78.359) 116.23,78.359 v1(117.373,79.502) 119.075,81.204 121.869,81.204 125.374,84.709 127.004,84.709 U76.R15@128.563,86.267
  IC3 w0.15: v1(94.285,123.241) 94.285,121.641 97.561,118.364 97.561,110.388 109.449,98.501 109.449,97.155 110.566,96.037 110.566,95.123 111.684,94.005 111.684,86.766 117.373,81.077 v1(117.373,79.502)
  FC4 w0.15: U76.R15@128.563,86.267 129.485,85.345 167.832,85.345 172.276,89.789 173.812,89.789 v1(174.015,89.992)
CPU_A4: U21.12 U51.137 U61.85 U76.S16 | length 164.1
  FC1 w0.15: U61.85@93.778,121.807 93.778,120.979 94.056,120.701 v1(94.056,104.038) ; U51.137@112.57,41.605 v1(113.614,41.605) ; U21.12@175.209,89.491 176.98,89.491 v1(176.987,89.484)
  FC3 w0.15: v1(113.614,41.605) 113.614,42.977 114.325,43.688 114.325,49.581 113.894,50.013 113.589,50.013 113.462,50.14 113.462,51.729 113.956,52.222 114.245,52.222 115.037,53.014 115.037,58.466 116.548,59.977 116.548,67.069 126.136,76.657 126.136,79.451 126.949,80.264 126.949,81.686 126.023,82.613 U76.S16@126.023,83.727
  IC4 w0.15: U76.S16@126.023,83.727 127.639,85.344 171.856,85.344 173.609,87.097 175.616,87.097 176.784,88.264 176.784,89.281 v1(176.987,89.484)
  BC2 w0.15: v1(94.056,104.038) 94.666,104.038 106.731,91.973 115.799,91.973 124.045,83.727 U76.S16@126.023,83.727
CPU_A5: U21.13 U51.138 U61.86 U76.Q12 | length 166.1
  FC1 w0.15: v1(93.269,122.885) 93.278,122.876 U61.86@93.278,121.807 ; U51.138@112.57,42.255 v1(114.529,42.255) ; v1(173.431,89.205) 173.645,88.991 U21.13@175.209,88.991
  FC2 w0.15: U76.Q12@131.103,93.887 139.539,93.887 144.551,88.875 149.479,88.875 150.926,90.322 154.406,90.322 154.685,90.043 172.593,90.043 v1(173.431,89.205)
  BC4 w0.15: v1(93.269,122.885) 94.367,122.885 94.72,122.532 96.723,122.532 97.22,122.035 97.22,119.542 106.348,110.414 112.039,110.414 114.062,108.391 114.097,108.391 115.81,106.677 116.69,106.677 117.71,105.658 119.81,105.658 125.107,100.36 131.267,100.36 132.029,99.598 132.029,94.814 U76.Q12@131.103,93.887
  BC3 w0.15: v1(114.529,42.255) 114.529,44.602 117.729,47.803 117.729,50.952 123.596,56.82 123.596,64.11 127.178,67.691 127.178,74.193 130.175,77.191 130.175,86.97 130.581,87.376 131.159,87.376 132.25,88.466 132.25,92.74 U76.Q12@131.103,93.887
CPU_A6: U21.14 U51.140 U61.87 U76.S15 | length 163.4
  FC1 w0.15: U61.87@92.778,121.807 92.702,120.997 92.177,120.472 92.177,107.061 v1(93.116,106.121) ; U51.140@112.57,43.555 113.507,43.555 v1(113.614,43.663) ; v1(125.984,61.595) 125.984,79.883 125.105,80.762 125.105,85.35 U76.S15@126.023,86.267 ; U21.14@175.209,88.491 176.4,88.491 v1(176.403,88.494)
  IC2 w0.15: v1(113.614,43.663) 114.529,44.577 114.529,50.038 117.653,53.162 121.691,53.162 122.174,53.645 122.174,56.769 125.984,60.579 v1(125.984,61.595)
  IC4 w0.15: U76.S15@126.023,86.267 127.283,87.528 170.612,87.528 171.577,88.494 v1(176.403,88.494)
  BC2 w0.15: v1(93.116,106.121) 99.543,106.121 104.752,100.912 110.871,100.912 114.958,96.825 114.958,94.831 117.357,92.432 117.357,91.766 122.856,86.267 U76.S15@126.023,86.267
CPU_A7: U21.15 U51.141 U61.88 U76.Q13 | length 178.2
  FC1 w0.15: U61.88@92.278,121.807 v1(92.278,122.885) ; U51.141@112.57,44.205 113.605,44.205 v1(115.951,41.859) ; v1(173.838,87.782) 174.046,87.991 U21.15@175.209,87.991
  IC2 w0.15: v1(150.495,84.328) 151.232,85.065 170.485,85.065 173.203,87.782 v1(173.838,87.782)
  BC2 w0.15: v1(92.278,122.885) 93.294,121.869 96.317,121.869 97.038,121.148 97.038,117.77 111.012,103.796 113.58,103.796 113.974,104.19 116.027,104.19 118.516,101.7 118.516,99.085 124.894,92.708 127.027,92.708 127.24,92.495 127.24,91.098 127.914,90.424 130.179,90.424 U76.Q13@131.103,91.347
  BC4 w0.15: U76.Q13@131.103,91.347 134.586,91.347 137.565,88.368 137.565,85.98 138.425,85.12 144.775,85.12 145.237,84.658 150.165,84.658 v1(150.495,84.328)
  BC3 w0.15: v1(115.951,41.859) 118.847,44.755 118.847,49.378 126.39,56.921 126.39,65.634 132.613,71.857 132.613,94.285 132.08,94.818 130.708,94.818 130.175,94.285 130.175,92.275 U76.Q13@131.103,91.347
CPU_A8: U21.16 U51.143 U61.89 U76.R13 | length 174
  FC1 w0.15: v1(91.77,120.726) 91.778,120.734 U61.89@91.778,121.807 ; v1(110.414,46.253) 111.162,45.505 U51.143@112.57,45.505 ; U21.16@175.209,87.491 176.569,87.491 v1(176.784,87.706)
  FC4 w0.15: U76.R13@128.563,91.347 129.486,90.424 140.36,90.424 143.56,93.623 144.375,93.623 144.653,93.345 151.257,93.345 151.333,93.421 153.365,93.421 153.816,92.97 168.033,92.97 v1(168.661,93.598)
  BC2 w0.15: v1(91.77,120.726) 91.77,123.62 92.001,123.85 94.186,123.85 94.205,123.831 95.356,123.831 95.375,123.85 96.114,123.85 97.268,122.696 97.268,119.114 110.693,105.689 113.462,105.689 114.021,105.131 118.262,105.131 118.796,104.597 118.796,99.263 125.095,92.964 127.156,92.964 127.519,92.602 127.519,92.391 U76.R13@128.563,91.347 ; v1(168.661,93.598) 173.608,93.598 176.301,90.904 176.301,89.484 176.784,89.002 v1(176.784,87.706)
  BC3 w0.15: v1(110.414,46.253) 111.328,47.168 111.328,48.768 108.382,51.714 108.382,58.217 109.779,59.614 109.779,61.239 127.533,78.994 127.533,79.985 127.229,80.289 127.229,82.88 127.406,83.058 127.406,83.515 127.051,83.871 127.051,89.836 U76.R13@128.563,91.347
CPU_A9: U21.17 U51.144 U61.90 U76.Q11 | length 187.6
  FC1 w0.15: U61.90@91.278,121.807 91.278,122.876 v1(91.288,122.885) ; U51.144@112.57,46.155 v1(115.113,46.155) ; 130.185,57.368 130.185,84.125 130.693,84.633 130.956,84.633 132.02,85.696 132.02,89.443 131.267,90.195 130.607,90.195 130.175,90.627 130.175,95.5 U76.Q11@131.103,96.427 ; v1(173.406,87.401) 173.816,86.991 U21.17@175.209,86.991
  IC2 w0.15: v1(115.113,46.155) 125.879,56.921 130.277,56.921 ; 130.185,57.368 130.277,57.277 130.277,56.921 ; v1(131.521,58.141) 130.301,56.921 130.277,56.921
  BC2 w0.15: v1(91.288,122.885) 91.288,123.952 91.796,124.46 94.017,124.46 94.416,124.061 95.126,124.061 95.525,124.46 95.875,124.46 99.539,120.796 99.539,119.282 110.388,108.433 117.221,108.433 125.425,100.228 126.39,100.228 126.949,99.67 126.949,96.266 127.94,95.275 129.95,95.275 U76.Q11@131.103,96.427
  BC3 w0.15: v1(131.521,58.141) 144.678,58.141 145.212,58.674 145.212,63.094 160.655,78.537 160.655,87.3 160.757,87.401 v1(173.406,87.401)
CPU_A10: U21.19 U51.145 U61.91 U76.S13 | length 170.4
  FC1 w0.15: v1(90.419,119.888) 90.419,120.62 90.778,120.979 U61.91@90.778,121.807 ; v1(110.414,47.041) 110.65,46.805 U51.145@112.57,46.805 ; v1(173.634,85.776) 173.838,85.98 U21.19@175.209,85.98
  FC2 w0.15: U76.S13@126.023,91.347 127.182,92.507 135.534,92.507 139.852,88.189 155.88,88.189 156.515,88.824 160.034,88.824 160.967,87.89 164.502,87.89 164.852,88.24 165.786,88.24 166.827,87.198 172.212,87.198 v1(173.634,85.776)
  FC3 w0.15: v1(110.185,103.276) 111.582,101.879 111.582,85.446 111.049,84.912 111.049,78.969 111.989,78.029 111.989,66.116 110.846,64.973 110.846,55.245 110.414,54.813 v1(110.414,47.041)
  BC2 w0.15: v1(90.419,119.888) 93.632,119.888 94.038,120.294 94.038,120.967 94.186,121.115 95.615,121.115 95.922,120.808 95.922,118.89 95.479,118.446 95.479,115.773 107.975,103.276 ; v1(110.185,103.276) 107.975,103.276 ; U76.S13@126.023,91.347 125.289,92.081 122.752,92.081 112.192,102.641 108.61,102.641 107.975,103.276
CPU_A11: U21.20 U51.146 U61.92 U76.R12 | length 176.4
  FC1 w0.15: U61.92@90.278,121.807 90.278,122.841 v1(90.322,122.885) ; U51.146@112.57,47.455 113.444,47.455 v1(113.969,47.98) ; v1(173.685,85.014) 174.143,85.472 U21.20@175.209,85.472
  FC2 w0.15: v1(117.272,85.674) 125.095,85.674 126.111,84.658 126.39,84.658 127.635,83.414 127.635,83.312 128.143,82.804 129.311,82.804 129.819,83.312 129.819,84.201 130.454,84.836 142.9,84.836 143.256,85.192 144.856,85.192 145.415,84.633 145.415,83.287 145.898,82.804 168.453,82.804 168.833,83.184 172.465,83.184 173.685,84.404 v1(173.685,85.014)
  FC3 w0.15: v1(113.969,47.98) 113.969,49.556 113.765,49.76 113.232,49.786 113.232,51.997 113.739,52.503 114.038,52.503 114.783,53.248 114.783,59.958 116.307,61.482 116.307,84.709 v1(117.272,85.674)
  IC4 w0.15: v1(117.272,85.674) 117.272,86.512 125.578,94.818 127.632,94.818 U76.R12@128.563,93.887
  BC4 w0.15: v1(90.322,122.885) 91.212,121.996 91.212,119.939 106.209,104.942 111.034,104.942 112.181,103.796 113.827,103.796 115.616,102.006 120.472,102.006 122.58,99.898 126.39,99.898 126.949,99.339 126.949,95.501 U76.R12@128.563,93.887
CPU_A12: U21.21 U51.147 U61.93 U76.S7 | length 184.9
  FC1 w0.15: U61.93@89.778,121.807 89.778,121.031 89.875,120.934 89.875,117.577 91.415,116.037 v1(91.415,108.179) ; v1(110.769,48.638) 111.303,48.105 U51.147@112.57,48.105 ; U21.21@175.209,84.964 v1(176.401,84.963)
  FC2 w0.15: v1(91.415,108.179) 91.897,107.696 115.265,107.696 115.382,107.58 115.976,107.58 116.245,107.848 120.802,107.848 122.063,106.587 U76.S7@126.023,106.587
  FC4 w0.15: v1(119.863,82.271) 119.942,82.35 145.18,82.35 145.398,82.569 160.985,82.569 161.22,82.804 162.611,82.804 163.119,83.312 163.119,84.455 163.308,84.645 167.196,84.645 167.615,84.226 175.664,84.226 v1(176.401,84.963)
  BC3 w0.15: v1(110.769,48.638) 107.34,52.067 107.34,59.969 107.975,60.603 107.975,61.416 108.509,61.95 109.62,61.95 123.723,76.054 123.723,86.131 ; v1(119.863,82.271) 123.723,86.131 ; U76.S7@126.023,106.587 123.723,104.288 123.723,86.131